# Altium PCB Internal_PCB_Thermostat_STM8_v1.0.PcbDoc
Units mm, origin at the board's own origin, x right, y up, seen from the top; angles counter-clockwise.
Board outline 56 x 90 mm, 2 copper layers (Top Layer, Bottom Layer), stack 1.671 mm thick; 60 components, 51 nets, 218 pads, 338 vias.
Unrouted connection lines stored in the file: 20.
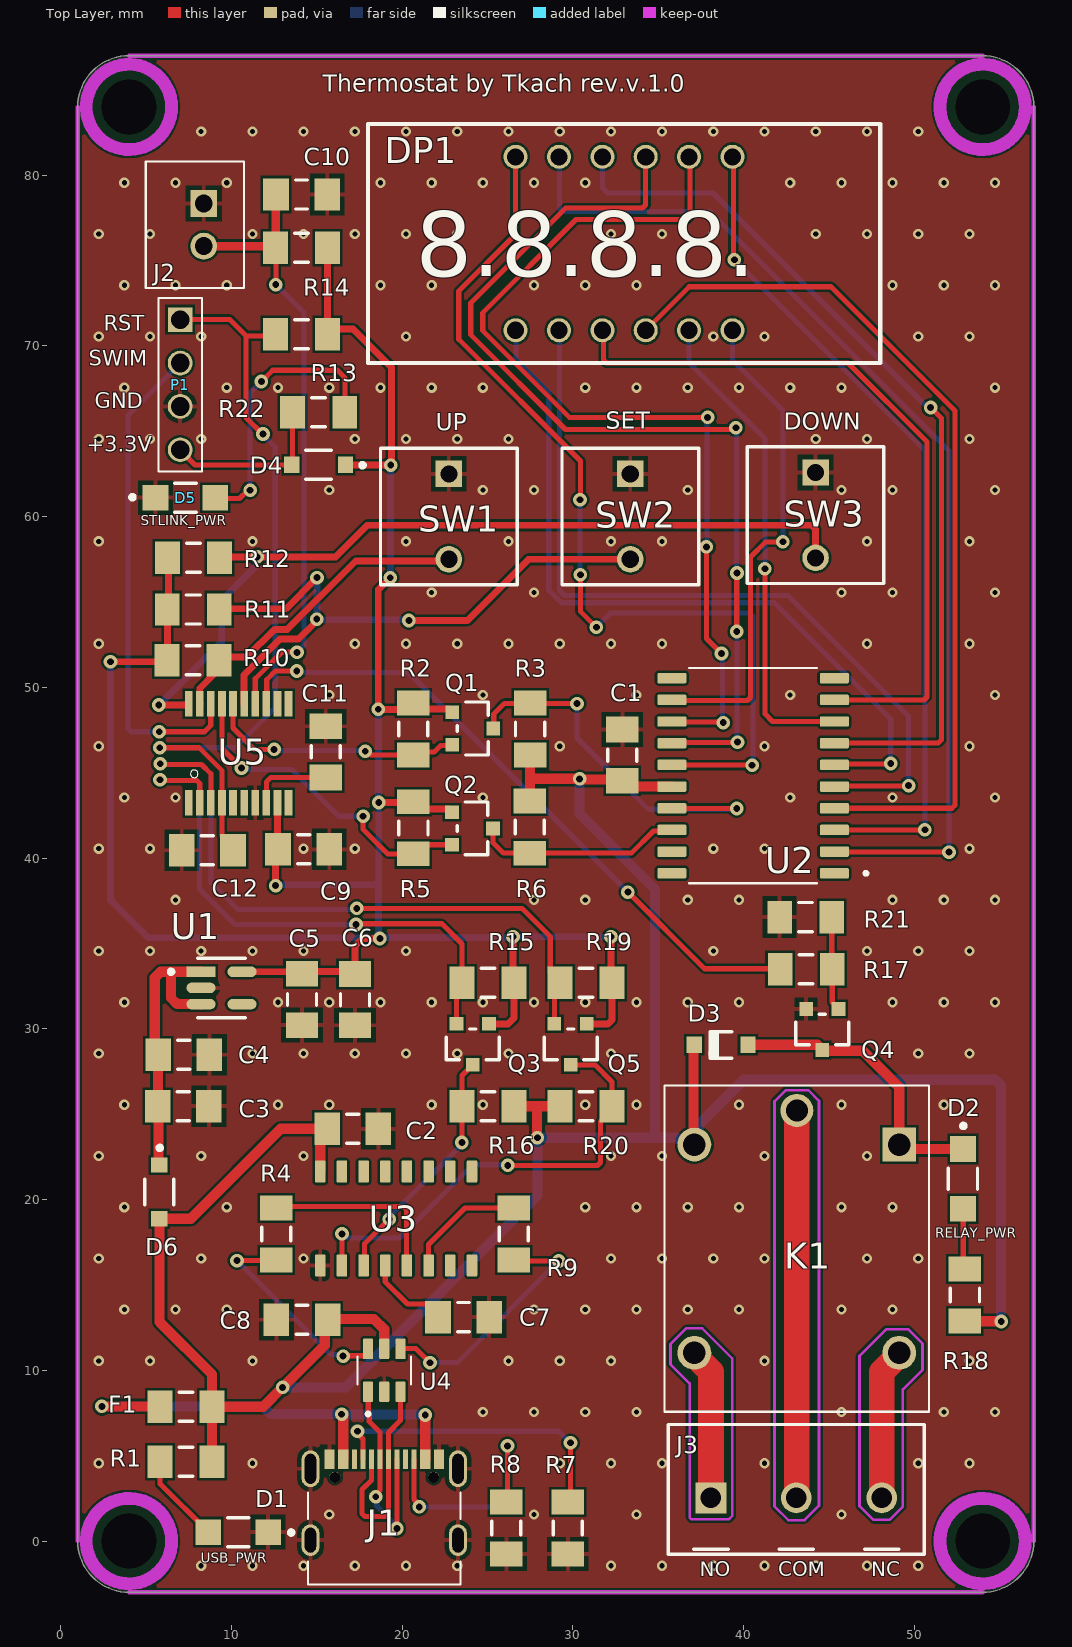
[diagram p0: Top Layer view]
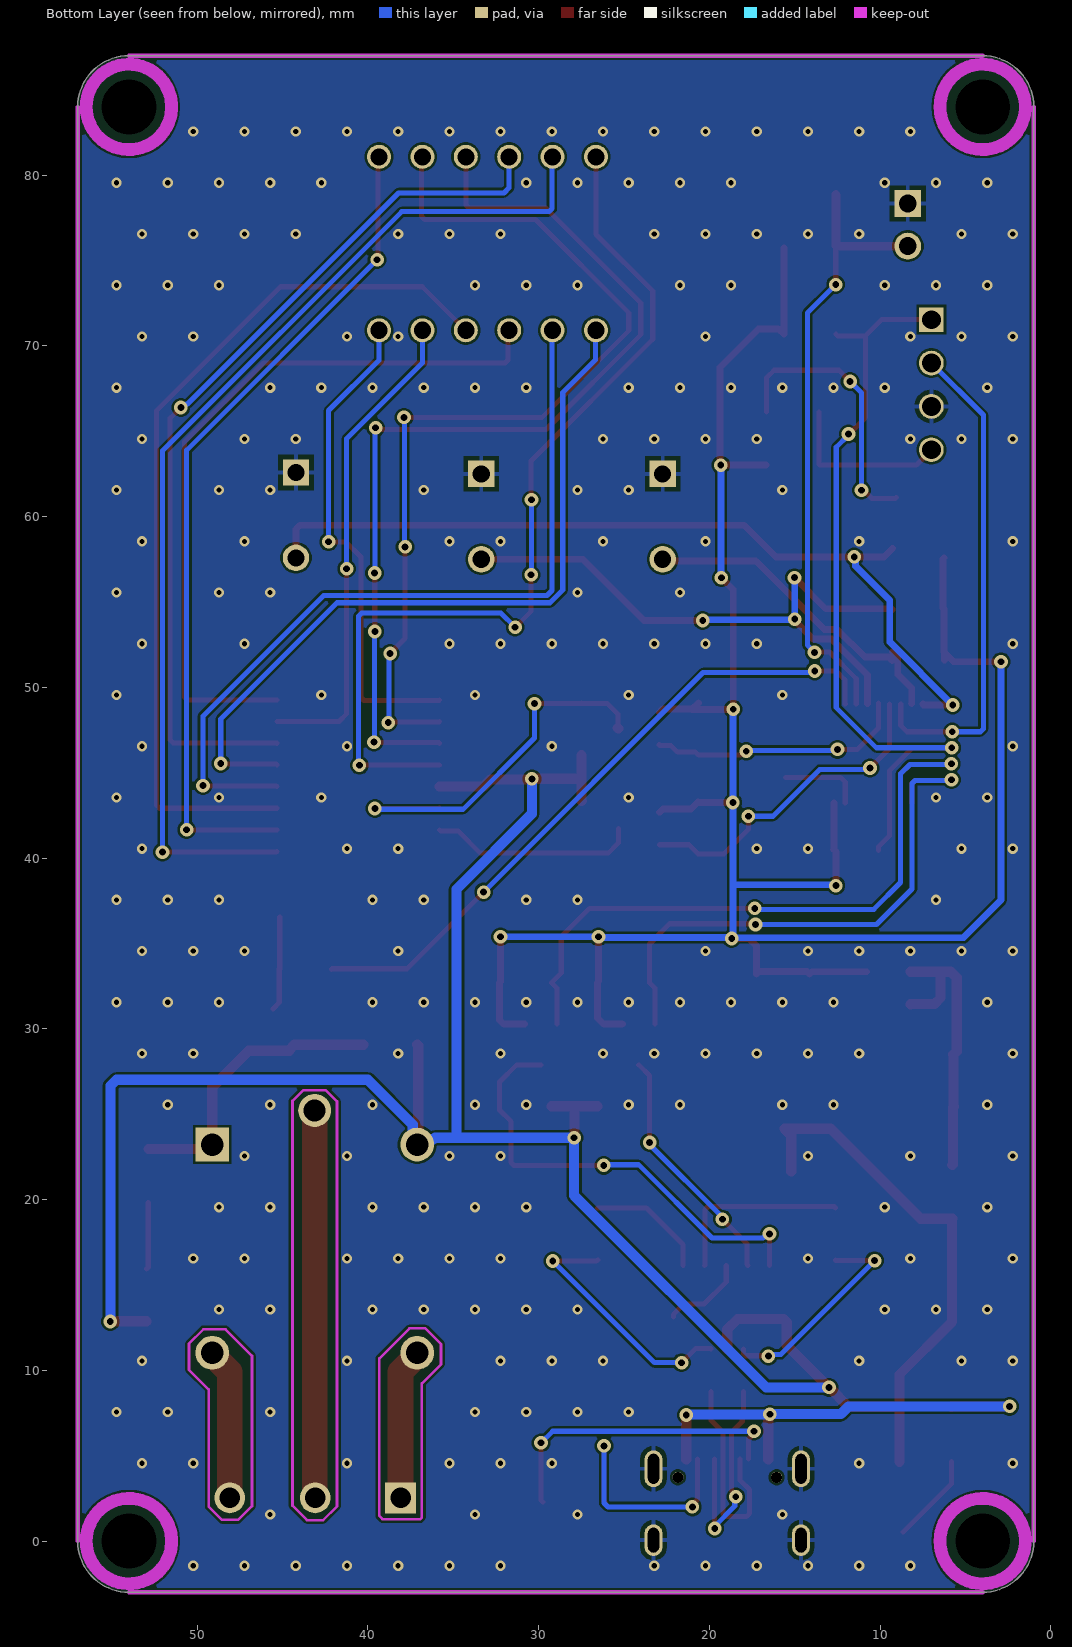
[diagram p1: Bottom Layer view, seen from below]

## Layer stack, top to bottom
Top Solder: solder mask 0.0102, Solder Resist, Dk 3.5
Top Layer: signal copper 0.0356
Dielectric 1: dielectric 1.6, FR-4, Dk 4.8
Bottom Layer: signal copper 0.0356
Bottom Solder: solder mask 0.0102, Solder Resist, Dk 3.5

## Board outline
1,0 ccw(c4,0) 4,-3 54,-3 ccw(c54,0) 57,0 57,84 ccw(c54,84) 54,87 4,87 ccw(c4,84) 1,84

## Design rules (kind name [scope] priority, off if disabled: settings)
Clearance [All] p1: gap=0.135 ignorepadtopadclearanceinfootprint=FALSE
ComponentClearance [All] p1: gap=0.18 collisioncheckmode=3 verticalgap=0.18 showdistances=FALSE
DiffPairsRouting [All] p1: maxlimit=0.18 minlimit=0.17 mostfreqgap=0.18 toplayer_minwidth=0.381 toplayer_maxwidth=0.381 toplayer_prefwidth=0.381 bottomlayer_minwidth=0.381 bottomlayer_maxwidth=0.381 bottomlayer_prefwidth=0.381 maxuncoupledlength=12.7
HoleSize [All] p1: absolutevalues=TRUE maxlimit=3.54 minlimit=0.025 maxpercent=80.000 minpercent=20.000
MinimumSolderMaskSliver [All] p1: minsoldermaskwidth=0.1
PolygonConnect PolygonConnect_GND [IsVia AND NOT IsComponent] p1: connectstyle=Direct reliefconductorwidth=0.3 reliefentries=4 polygonreliefangle="90 Angle" airgapwidth=0.3
PolygonConnect PolygonConnect_1 [All] p2: connectstyle=Relief reliefconductorwidth=0.254 reliefentries=4 polygonreliefangle="90 Angle" airgapwidth=0.254
RoutingVias [All] p1: holewidth=0.4 width=0.8 viastyle="Through Hole" minholewidth=0.3 minwidth=0.6 maxholewidth=0.711 maxwidth=1.27
SilkToSilkClearance [All] p1: silktosilkclearance=0.16
SilkToSolderMaskClearance [IsPad] p1: minsilkscreentomaskgap=0.154 clearancetoexposedcopper=TRUE
SolderMaskExpansion Via_Tenting [IsVia] p1: expansion=0.102 istentingtop=TRUE
SolderMaskExpansion SolderMaskExpansion_1 [All] p2: expansion=0 istentingtop=FALSE
SupplyNets "Schematic Supply Nets_2" [InNet('+5V')] p1: voltage=0.000
SupplyNets "Schematic Supply Nets_1" [InNet('+3.3V')] p2: voltage=0.000
SupplyNets "Schematic Supply Nets" [InNet('GND')] p3: voltage=0.000
Width Width_Power [InNet('GND') or InNet('+5V') or InNet('+3.3V')] p1: maxlimit=3.5 minlimit=0.18 preferedwidth=0.6
Width Width_1 [All] p2: maxlimit=3.5 minlimit=0.16 preferedwidth=0.3
24 further rules are at their usual default settings.

## Classes and differential pairs
component class U_UART: C2 C7 Q3 Q5 R15 R16 R19 R20 U3
component class U_TM1637_Display: C1 DP1 Q1 Q2 R2 R3 R5 R6 U2
component class U_Relay: D2 D3 J3 K1 Q4 R17 R18 R21
component class U_Power: C3 C4 C5 C6 C8 D1 D6 F1 J1 R1 R4 R7 R8 R9 U1 U4
component class U_NTC: C10 J2 R14
component class U_STM8S103F3P6: 3 C9 C11 C12 D4 D5 P1 R10 R11 R12 R13 R22 SW1 SW2 SW3 U5

## Components (designator, comment, footprint, x,y, rotation, side; value= is the part's Value field where it differs from the comment)
C1 "C1206C104K5RACAUTO" CAPC3216X18M 32.901,46.035 r90 top value="0.10 μF"
C2 "C1206C104K5RACAUTO" CAPC3216X18M 17.108,24.144 r0 top value="0.10 μF"
C3 "CGA5L1X7R1C106KT0Y0N" CAPC3216X18M 7.184,25.474 r0 top
C4 "CC1206KFX7R7BB105" CAPC3216X18M 7.211,28.486 r0 top value="1 uF"
C5 "CGA5L1X7R1C106KT0Y0N" CAPC3216X18M 14.135,31.723 r270 top
C6 "CC1206KFX7R7BB105" CAPC3216X18M 17.241,31.712 r270 top value="1 uF"
C7 "C1206C104K5RACAUTO" CAPC3216X18M 23.599,13.121 r0 top value="0.10 μF"
C8 "C1206C104K5RACAUTO" CAPC3216X18M 14.135,12.964 r180 top value="0.10 μF"
C9 "C1206C104K5RACAUTO" CAPC3216X18M 14.229,40.516 r0 top value="0.10 μF"
C10 "C1206C104K5RACAUTO" CAPC3216X18M 14.111,78.872 r180 top value="0.10 μF"
C11 "C1206C225K5RACAUTO" CAPC3216X18M 15.529,46.226 r90 top
C12 "C1206C104K5RACAUTO" CAPC3216X18M 8.596,40.465 r180 top value="0.10 μF"
D1 "LTST-C150KRKT" FP-LTST-C150KRKT-MFG 10.402,0.526 r180 top
D2 "LTST-C150KRKT" FP-LTST-C150KRKT-MFG 52.851,21.217 r270 top
D3 "1N4148W-7-F" DIOD-SOD123-2_V 38.683,29.066 r180 top
D4 "1N5819HW-7-F" FP-SOD123-MFG 15.109,63.036 r180 top
D5 "LTST-C150KRKT" FP-LTST-C150KRKT-MFG 7.307,61.115 r0 top
D6 "1N5819HW-7-F" FP-SOD123-MFG 5.778,20.451 r270 top
DP1 "Display" 3461BS-1 33,76 r0 top
F1 "MF-NSMF050-2" RESC3216X06M 7.344,7.873 r0 top value=0.15-0.7Ω
J1 "USB_TYPE_C_2_0" "USB TYPE-C 16PIN" 18.954,0.054 r0 top
J2 "B2B-XH-A" JST_B2B-XH-A 7.857,77.098 r90 top
J3 "39543-0603" 39543-0603 43.092,3.029 r180 top
K1 "SRD-05VDC-SL-C" RELAY_SRD-05VDC-SL-C 43.118,17.124 r270 top
P1 "61300411121" WURTH_61300411121 7,67.73 r270 top
Q1 "2N7002-7-F" FP-SOT23-MFG 24.137,47.594 r0 top
Q2 "2N7002-7-F" FP-SOT23-MFG 24.127,41.737 r0 top
Q3 "2N7002-7-F" FP-SOT23-MFG 24.137,29.094 r270 top
Q4 "2N7002-7-F" FP-SOT23-MFG 44.615,29.966 r270 top
Q5 "2N7002-7-F" FP-SOT23-MFG 29.87,29.094 r270 top
R1 "CRGCQ1206F1K0" RESC3216X06M 7.344,4.642 r180 top value=1KΩ
R2 "CRGP1206F10K" RESC3216X06M 20.648,47.568 r270 top value=10KΩ
R3 "CRGP1206F10K" RESC3216X06M 27.493,47.568 r90 top value=10KΩ
R4 "SR0603FR-7T22RL" RESC3216X06M 12.622,17.989 r90 top value=22Ω
R5 "CRGP1206F10K" RESC3216X06M 20.665,41.777 r270 top value=10KΩ
R6 "CRGP1206F10K" RESC3216X06M 27.483,41.816 r270 top value=10KΩ
R7 "ESR18EZPF5101" RESC3216X06M 29.712,0.76 r90 top
R8 "ESR18EZPF5101" RESC3216X06M 26.109,0.76 r90 top
R9 "SR0603FR-7T22RL" RESC3216X06M 26.543,17.989 r90 top value=22Ω
R10 "CRGP1206F10K" RESC3216X06M 7.754,51.594 r180 top value=10KΩ
R11 "CRGP1206F10K" RESC3216X06M 7.768,54.565 r180 top value=10KΩ
R12 "CRGP1206F10K" RESC3216X06M 7.784,57.591 r180 top value=10KΩ
R13 "CRGP1206F10K" RESC3216X06M 14.111,70.687 r0 top value=10KΩ
R14 "CRGP1206F10K" RESC3216X06M 14.111,75.755 r180 top value=10KΩ
R15 "CRGCQ1206F1K0" RESC3216X06M 25.035,32.702 r0 top value=1KΩ
R16 "CRGCQ1206F1K0" RESC3216X06M 25.03,25.474 r0 top value=1KΩ
R17 "CRGCQ1206F1K0" RESC3216X06M 43.667,33.495 r180 top value=1KΩ
R18 "CRGCQ1206F1K0" RESC3216X06M 52.968,14.41 r90 top value=1KΩ
R19 "CRGCQ1206F1K0" RESC3216X06M 30.768,32.702 r0 top value=1KΩ
R20 "CRGCQ1206F1K0" RESC3216X06M 30.768,25.474 r180 top value=1KΩ
R21 "CRGP1206F10K" RESC3216X06M 43.638,36.551 r0 top value=10KΩ
R22 "CRGCQ1206F1K0" RESC3216X06M 15.109,66.116 r0 top value=1KΩ
SW1 "EVQ-QJJ05Q" FP-EVQ-QJJ05Q-MFG 22.737,60.005 r0 top
SW2 "EVQ-QJJ05Q" FP-EVQ-QJJ05Q-MFG 33.364,60.005 r0 top
SW3 "EVQ-QJJ05Q" FP-EVQ-QJJ05Q-MFG 44.216,60.089 r0 top
U1 "AP2112K-3.3TRG1" FP-SOT25-IPC_A 9.419,32.398 r0 top
U2 "TM1637_SOP20" SOIC127P1035X255-20N 40.559,44.828 r180 top
U3 "CH340C" SOIC127P600X180-16N 19.647,18.894 r90 top
U4 "USBLC6-2SC6" SOT95P280X145-6N 18.954,10 r90 top
U5 "STM8S103F3P6" SOP65P640X120-20N 10.422,46.139 r90 top

## Footprints (in the part's own frame and the unit in brackets; to place one, negate y for a bottom-side part, rotate by r counter-clockwise, add the part's x,y. Pads: shape width x height; smd on the part's side, far side on the other; paste and mask are expansions set on the pad)
3461BS-1 [mm] "4 digit 7 segment led common anode led display"
  round 1.406 hole 1: D1(-6.35,5.08) D2(1.27,5.08) D3(3.81,5.08) D4(6.35,-5.08) DP(-1.27,-5.08) SEGA(-3.81,5.08) SEGB(6.35,5.08) SEGC(1.27,-5.08) SEGD(-3.81,-5.08) SEGE(-6.35,-5.08) SEGF(-1.27,5.08) SEGG(3.81,-5.08)
  silkscreen extent -15,-7 15,7, body extent -14.92,-6.98 15.08,7.01, height 7.6
39543-0603 [mm]
  rect 1.8x1.8 / inner round 1.8 / far side rect 1.8x1.8 hole 1.2: 1(5,0.5)
  round 1.8 hole 1.2: 2(0,0.5) 3(-5,0.5)
  silkscreen extent -7.5,-3.8 7.5,3.8, body extent -7.53,-3.99 8.07,3.61, height 10.5
CAPC3216X18M [mm] "Chip Capacitor, 2-Leads, Body 3,20x1,60mm, IPC Low Density"
  rect 1.5x1.9 smd: 1(-1.5,0) 2(1.5,0)
  silkscreen extent -0.35,-0.85 0.35,0.85, body extent -1.7,-0.9 1.7,0.9, height 1.8
DIOD-SOD123-2_V [mm] "SOD123, 2-Leads, Body 2.7x1.55mm, Height 1.45mm"
  rect 0.9x0.95 smd: 1(-1.575,0) 2(1.575,0)
  silkscreen extent -0.64,-0.82 0.64,0.77, body extent -1.35,-0.77 1.35,0.77, height 1.45
FP-EVQ-QJJ05Q-MFG [mm]
  rect 1.55x1.55 hole 1 paste-2539.97 mask+0: A(0,2.5)
  round 1.55 hole 1 paste-2539.97 mask+0: B(0,-2.5)
  silkscreen extent -4,-4 4,4, body extent -4.4,-4.1 4.1,4.1, height 0.25
FP-LTST-C150KRKT-MFG [mm]
  rect 1.5x1.5 smd paste+0 mask+0: 1(-1.75,0) 2(1.75,0)
  silkscreen extent -3.22,-0.85 0.63,0.85, body extent -2.6,-0.95 2.6,0.95, height 0.25
FP-SOD123-MFG [mm]
  rect 0.9x0.95 smd paste+0 mask+0: 1(-1.575,0) 2(1.575,0)
  silkscreen extent -2.7,-0.85 0.75,0.85, body extent -2.12,-0.95 2.12,0.95, height 0.25
FP-SOT23-MFG [mm]
  rect 0.8x0.8 smd paste+0 mask+0: 1(-1.2,0.95) 2(-1.2,-0.95) 3(1.2,0)
  silkscreen extent -0.9,-1.55 0.9,1.55, body extent -1.7,-1.78 1.7,1.78, height 0.25
FP-SOT25-IPC_A [mm]
  rect 1.707x0.616 smd paste+0 mask+0: 1(-1.201,0.95)
  rrect100% 1.707x0.616 smd paste+0 mask+0: 2(-1.201,0) 3(-1.201,-0.95) 4(1.201,-0.95) 5(1.201,0.95)
  silkscreen extent -3.08,-1.75 1.4,1.75, body extent -2.55,-2 2.55,2, height 0.25
JST_B2B-XH-A [mm]
  rect 1.575x1.575 / inner round 1.575 / far side rect 1.575x1.575 hole 1.05: 1(1.25,-0.525)
  round 1.575 hole 1.05: 2(-1.25,-0.525)
  silkscreen extent -3.7,-2.88 3.7,2.88, body extent -3.81,-2.96 3.69,2.94, height 7
RELAY_SRD-05VDC-SL-C [mm]
  rect 1.98x1.98 / inner round 1.98 / far side rect 1.98x1.98 hole 1.32: A1(-6.1,6)
  round 1.98 hole 1.32: A2(-6.1,-6) NC(6.1,6) NO(6.1,-6)
  round 1.935 hole 1.29: COM(-8.1,0)
  silkscreen extent -9.55,-7.75 9.55,7.75, body extent -9.6,-7.8 9.6,7.8, height 15.8
RESC3216X06M [mm] "Chip Resistor, 2-Leads, Body 3,20x1,60mm, IPC Low Density"
  rect 1.45x1.9 smd: 1(-1.525,0) 2(1.525,0)
  silkscreen extent -0.4,-0.85 0.4,0.85, body extent -1.7,-0.9 1.7,0.9, height 0.6
SOIC127P600X180-16N [mm]
  rrect25% 1.31x0.62 smd: 1(-2.75,4.445) 2(-2.75,3.175) 3(-2.75,1.905) 4(-2.75,0.635) 5(-2.75,-0.635) 6(-2.75,-1.905) 7(-2.75,-3.175) 8(-2.75,-4.445) 9(2.75,-4.445) 10(2.75,-3.175) 11(2.75,-1.905) 12(2.75,-0.635) 13(2.75,0.635) 14(2.75,1.905) 15(2.75,3.175) 16(2.75,4.445)
  body extent -3,-5 3,5, height 1.8
SOIC127P1035X255-20N [mm]
  rrect25% 1.7x0.61 smd: 1(-4.76,5.715) 2(-4.76,4.445) 3(-4.76,3.175) 4(-4.76,1.905) 5(-4.76,0.635) 6(-4.76,-0.635) 7(-4.76,-1.905) 8(-4.76,-3.175) 9(-4.76,-4.445) 10(-4.76,-5.715) 11(4.76,-5.715) 12(4.76,-4.445) 13(4.76,-3.175) 14(4.76,-1.905) 15(4.76,-0.635) 16(4.76,0.635) 17(4.76,1.905) 18(4.76,3.175) 19(4.76,4.445) 20(4.76,5.715)
  silkscreen extent -6.71,-6.3 3.75,6.3, body extent -5.18,-6.3 5.18,6.3, height 2.55
SOP65P640X120-20N [mm]
  rect 1.5x0.45 smd: 1(-2.9,2.925) 2(-2.9,2.275) 3(-2.9,1.625) 4(-2.9,0.975) 5(-2.9,0.325) 6(-2.9,-0.325) 7(-2.9,-0.975) 8(-2.9,-1.625) 9(-2.9,-2.275) 10(-2.9,-2.925) 11(2.9,-2.925) 12(2.9,-2.275) 13(2.9,-1.625) 14(2.9,-0.975) 15(2.9,-0.325) 16(2.9,0.325) 17(2.9,0.975) 18(2.9,1.625) 19(2.9,2.275) 20(2.9,2.925)
  silkscreen extent -1.42,2.38 -0.98,2.82, body extent -3.2,-3.25 3.2,3.25, height 1.73
SOT95P280X145-6N [mm]
  rrect25% 1.21x0.59 smd: 1(-1.255,0.95) 2(-1.255,0) 3(-1.255,-0.95) 4(1.255,-0.95) 5(1.255,0) 6(1.255,0.95)
  silkscreen extent -2.65,-1.57 0.81,1.57, body extent -1.4,-1.46 1.4,1.46, height 1.4
"USB TYPE-C 16PIN" [mm] "USB Type C Receptacle SMT Single Row 16Pin"
  rect 0.6x1.15 smd: A1/B12(-3.2,4.745) A4/B9(-2.4,4.745) B1/A12(3.2,4.745) B4/A9(2.4,4.745)
  rect 0.3x1.15 smd: A5(-1.25,4.745) A6(-0.25,4.745) A7(0.25,4.745) A8(1.25,4.745) B5(1.75,4.745) B6(0.75,4.745) B7(-0.75,4.745) B8(-1.75,4.745)
  oval 1.05x2.15 hole 0.65 slot 1.75 at 90 deg: SH1(-4.32,4.18) SH2(4.32,4.18)
  oval 1.05x1.85 hole 0.65 slot 1.45 at 90 deg: SH3(-4.32,0) SH4(4.32,0)
  round 0.65 hole 0.65 unplated: ""(-2.89,3.68) ""(2.89,3.68)
  silkscreen extent -4.47,-2.6 4.47,2.79, body extent -4.47,-2.6 4.47,5, height 3.26
WURTH_61300411121 [mm]
  rect 1.45x1.45 / inner round 1.45 / far side rect 1.45x1.45 hole 1.1: 1(-3.81,0)
  round 1.45 hole 1.1: 2(-1.27,0) 3(1.27,0) 4(3.81,0)
  silkscreen extent -5.08,-1.27 5.08,1.27, body extent -5.08,-1.27 5.08,1.27, height 7.27

## Part data
C1 C2 C7 C8 C9 C10 C12: library part CMP-03020-005759-1, "CAP CER 0.1UF 50V X7R 1206", Capacitance="0.10 μF", Manufacturer=KEMET, Package=C1206C-EB, Temperature="-55°C to +150°C", Temperature Characteristic=X7R, Temperature Coefficient=15%, Temperature Range High=+150°C, Temperature Range Low=-55°C, Tolerance=0.1, Voltage Rating="50 V", Automotive=Yes, Automotive Grade="Grade 0", Category=Cap, ComponentLink2Description=Datasheet, ComponentLink2URL=https://content.kemet.com/datasheets/KEM_C1007_X8R_ULTRA_150C_SMD.pdf, Device Class L1="Passive Components", Device Class L2=Capacitors, Device Class L3="Ceramic Capacitors", Digikey Description="CAP CER 0.1UF 50V X7R 1206", Height=0.88mm, Ipc Land Pattern Name=CAPC320160X78, Lead Free=Yes, Manufacturer Part Number=C1206C104K5RACAUTO, Material=Ceramic, Mouser Description="Multilayer Ceramic Capacitors MLCC - SMD/SMT 0.1uF 50volts 10% X7R AUTO", Octopart=https://octopart.com/c1206c104k5racauto-kemet-12595586, RoHS=TRUE
C3 C5: library part CMP-08246-001386-1, "Cap Ceramic 10uF 16V X7R 10% Pad SMD 1206 +125°C Automotive T/R", Capacity=10uF
C4 C6: library part CMP-03422-001151-1, "CC1206 1 uF X7R 10.00%16 V", Capacitance="1 uF", Manufacturer=Yageo, Package=CC1206-1.25, Temperature="-55°C to +125°C", Temperature Characteristic=X7R, Temperature Coefficient=15%, Temperature Range High=+125°C, Temperature Range Low=-55°C, Tolerance=0.1, Voltage Rating="16 V", Automotive=No, Automotive Grade=NA, Category=Cap, ComponentLink2Description=Datasheet, ComponentLink2URL=http://www.yageo.com/documents/recent/UPY-NP0X7R_HV_1KV-to-3KV_11.pdf, Device Class L1="Passive Components", Device Class L2=Capacitors, Device Class L3="Ceramic Capacitors", Footprint Url=http://www.yageo.com/exep/pages/download/literatures/UPY-C_GEN_24.pdf, Height=1.45mm, Lead Free=Yes, Manufacturer Part Number=CC1206KFX7R7BB105, Material=Ceramic, Mouser Description="Multilayer Ceramic Capacitors MLCC - SMD/SMT 1.0uF 16V X7R 10%", Octopart=https://octopart.com/cc1206kfx7r7bb105-yageo-22250947, RoHS=TRUE
C11: library part CMP-03020-034660-1, "CAP CER 2.2UF 50V X7R 1206", Capacitance=2.2uF, Case Code (Imperial)=1206, Case Code (Metric)=3216, Dielectric=X7R, Dielectric Material=Ceramic, Max Operating Temperature=125°C, Min Operating Temperature=-55°C, Package Quantity=1, Ratings=AEC-Q200, Tolerance=10%, Voltage Rating=50V, Case/Package=1206, Construction=Flat, Contact Plating=Tin, Depth=1.6mm, Height=1.6mm, Length=3.2mm, Mount="Surface Mount", Packaging="Tape and Reel", Radiation Hardening=No, REACH SVHC="No SVHC", RoHS Compliant=Yes, Series=C, Termination=SMD/SMT, Thickness=0.071inch, Voltage Rating (DC)=50V, Width=0.063inch
D1 D2 D5: library part 8706943c75ba83719d021d2fdc84c58, "LED RED CLEAR 1206 SMD", Case Code (Imperial)=1206, Case Code (Metric)=3216, Color=Red, Forward Current=30mA, Forward Voltage=2V, Lens Color=Colorless, Max Operating Temperature=85°C, Min Operating Temperature=-30°C, Package Quantity=1, Power Dissipation=62.5mW, Power Rating=75mW, Reverse Voltage=5V, Test Current=20mA, Case/Package=1206, Depth=1.6mm, Dominant Wavelength=631nm, Height=1.1mm, Illumination Color=Red, Lead Free="Lead Free", Length=3.2mm, Lens Style=Diffused, Lens Transparency=Clear, Luminous Intensity=54mcd, Mount="Surface Mount", Number of Elements=1, Number of LEDs=1, Number of Pins=2, Packaging="Tape and Reel", Radiation Hardening=No, Viewing Angle=130°, Wavelength=639nm, Width=1.6mm
D3: library part CMP-2000-04932-2, "Fast Switching Diode, 100 V, 0.15 A, -65 to 150 degC, 2-Pin?SOD123, RoHS, Tape and Reel", If - Forward Current=0.15A, Ir - Reverse Current=1uA, Manufacturer=DiodesIncorporated, Max Surge Current=2A, Maximum Operating Temperature=+150C, Minimum Operating Temperature=-65C, Operating Temperature Range=-65Cto+150C, Package / Case=SOD-123, Package Reference=SOD123-2, Peak Reverse Voltage=100V, Vf - Forward Voltage=1.25V, Brand=DiodesIncorporated, Configuration=Single, Datasheet URL=http://www.farnell.com/datasheets/1915529.pdf, Datasheet Version="Rev. 24-2, 10/2013", Factory Pack Quantity=3000, Height=1.25mm, Length=2.85mm, Manufacturer URL=http://www.diodes.com/, Mounting Style=SMD/SMT, Package URL=http://www.diodes.com/datasheets/ds18004.pdf, Packaging=Reel, Product=SwitchingDiodes, Product Category=Diodes-GeneralPurpose,Power,Switching, Recovery Time=4ns, RoHS=True, Series=1N4148, Type=SwitchingDiode, Unit Weight=0.000353oz, Width=1.7mm
D4 D6: library part CMP-0303-00003-3, "DIODE SCHOTTKY 40V 1A SOD123", Average Rectified Current=1A, Capacitance=110pF, Case/Package=SOD-123-2, Forward Voltage=450mV, Max Forward Surge Current (Ifsm)=25A, Max Operating Temperature=125°C, Max Power Dissipation=450mW, Max Repetitive Reverse Voltage (Vrrm)=40V, Min Operating Temperature=-65°C, Package Quantity=3000, Peak Reverse Current=50uA, Contact Plating=Tin, Current Rating=1A, Element Configuration=Single, Forward Current=1A, Height=1.25mm, Lead Free="Lead Free", Length=2.85mm, Max Reverse Voltage (DC)=40V, Number of Pins=2, Output Current=1A, Packaging="Tape and Reel", Peak Non-Repetitive Surge Current=25A, Polarity=Standard, Radiation Hardening=No, REACH SVHC="No SVHC", Termination=SMD/SMT, Voltage Rating (DC)=40V, Weight=0.000353oz, Width=1.7mm
DP1: library part Component_1_1
F1: library part CMP-07400-000036-1, "PTC RESET FUSE 13.2V 500MA 1206", Ambient Temperature Range High=+85°C, Ambient Temperature Range Low=-40°C, Current Rating=100A, Hold Current=0.5A, Manufacturer=Bourns, Resistance=0.15-0.7Ω, Temperature="-40°C to +85°C", Trip Current=1A, Voltage Rating=13.2V, Automotive=Yes, Automotive Grade="Grade 3", Category=Fuse, ComponentLink2Description=Datasheet, ComponentLink2URL=https://www.bourns.com/docs/product-datasheets/mfnsmf.pdf?sfvrsn=39c76af6_14, Device Class L1="Circuit Protection", Device Class L2="PTC Resettable Fuses", Device Class L3=unset, Digikey Description="PTC RESET FUSE 13.2V 500MA 1206", Height=0.85mm, Lead Free=Yes, Manufacturer Part Number=MF-NSMF050-2, Mouser Description="Resettable Fuses - PPTC 0.50A 13.2V 0.15ohm 1206 Footprint", Octopart=https://octopart.com/mf-nsmf050-2-bourns-34532, Package=MF-NSMF050-2, RoHS=TRUE, Temperature Range High=+85°C, Temperature Range Low=-40°C, Trip Time=0.1s
J1: library part USB_CMP-002-00072-1, "USB-C (USB TYPE-C) USB 2.0 Receptacle Connector 24 (16+8 Dummy) Position Surface Mount, Right Angle", Case/Package=None, Check_prices=https://www.snapeda.com/parts/USB4110GFA/Global+Connector+Technology/view-part/?ref=eda, Component Type=Connectors, Design Item ID=USB4110GFA, MF="Global Connector Technology", MP=USB4110GFA, Pins=16, SnapEDA_Link=https://www.snapeda.com/parts/USB4110GFA/Global+Connector+Technology/view-part/?ref=snap, Source=USB4110GFA.SchLib
J2: library part CMP-033-000000-1, Package=None, Availability=Unavailable, Component Type=Standard, Design Item ID=B2B-XH-A, MF="{'manufacturer': u'JST Sales America Inc.'}", MP=B2B-XH-A, Pin Count=2, Price=None, Source=B2B-XH-A.SchLib
J3: library part CMP-037-000000-1, "3 Position Wire to Board Terminal Block Horizontal with Board 0.197 (5.00mm) Through Hole", Package=None, Check_prices=https://www.snapeda.com/parts/395430603/Molex/view-part/?ref=eda, Component Type=Mechanicals, Design Item ID=39543-0603, MF=Molex, MP=395430603, Pin Count=3, SnapEDA_Link=https://www.snapeda.com/parts/395430603/Molex/view-part/?ref=snap, Source=39543-0603.SchLib
K1: library part CMP-013-000000-1, "5V Trigger Relay Module For Arduino And Raspberry Pi 5V Trigger Relay Module For Arduino And Raspberry Pi", Package="NON STANDARD-5 Songle Relay", Availability="Not in stock", Check_prices=https://www.snapeda.com/parts/SRD-05VDC-SL-C/Songle+Relay/view-part/?ref=eda, Component Type=Standard, Design Item ID=SRD-05VDC-SL-C, MF="Songle Relay", MP=SRD-05VDC-SL-C, Pin Count=5, Price=None, SnapEDA_Link=https://www.snapeda.com/parts/SRD-05VDC-SL-C/Songle+Relay/view-part/?ref=snap, Source=SRD-05VDC-SL-C.SchLib
P1: "Connector Header Through Hole 4 position 0.100 (2.54mm)", Package=None, Check_prices=https://www.snapeda.com/parts/61300411121/W%25C3%25BCrth+Elektronik+Midcom/view-part/?ref=eda, MF="WÃ¼rth Elektronik", MP=61300411121, SnapEDA_Link=https://www.snapeda.com/parts/61300411121/W%25C3%25BCrth+Elektronik+Midcom/view-part/?ref=snap
Q1 Q2 Q3 Q4 Q5: library part 3b9c635fedb024a5347a57b145af9cc, "MOSFET N-CH 60V 115MA SOT23-3", Case/Package=SOT-23, Continuous Drain Current (ID)=115mA, Drain to Source Breakdown Voltage=70V, Drain to Source Resistance=7.5R, Drain to Source Voltage (Vdss)=60V, Gate to Source Voltage (Vgs)=20V, Input Capacitance=50pF, Max Operating Temperature=150°C, Max Power Dissipation=300mW, Min Operating Temperature=-55°C, Package Quantity=3000, Power Dissipation=540mW, Threshold Voltage=2.5V, Contact Plating=Tin, Current Rating=115mA, Dual Supply Voltage=60V, Element Configuration=Single, Fall Time=5.6ns, Height=1mm, Lead Free="Lead Free", Length=2.9mm, Mount="Surface Mount", Nominal Vgs=2.5V, Number of Channels=1, Number of Elements=1, Number of Pins=3, On-State Resistance=7.5R, Packaging="Tape and Reel", Radiation Hardening=No, Rds On Max=7.5R, REACH SVHC="No SVHC", Rise Time=3ns, Termination=SMD/SMT, Turn-Off Delay Time=11ns, Turn-On Delay Time=7ns, Voltage=60V, Voltage Rating (DC)=60V, Weight=0.000282oz, Width=1.3mm
R1 R15 R16 R17 R18 R19 R20 R22: library part CMP-03211-006592-1, "CRGCQ1206 1KΩ 0.25W 1% ±100ppm/°C 200V", Ambient Temperature Range High=+70°C, Manufacturer="TE Connectivity", Package=CRGCQ1206, Power Rating=0.25W, Resistance=1KΩ, Temperature="-55°C to +155°C", Temperature Coefficient=±100ppm/°C, Temperature Range High=+155°C, Temperature Range Low=-55°C, Tolerance=0.01, Voltage Rating=200V, Automotive=Yes, Automotive Grade="Grade 685", Category=Res, ComponentLink2Description=Datasheet, ComponentLink2URL=https://www.te.com/commerce/DocumentDelivery/DDEController?Action=showdoc&DocId=Data+Sheet%7F1773204-3%7F1%7Fpdf%7FEnglish%7FENG_DS_1773204-3_1.pdf%7F4-2176347-694, Composition="Thick Film", Device Class L1="Passive Components", Device Class L2=Resistors, Device Class L3="Chip SMD Resistors", Height=0.65mm, Ipc Land Pattern Name=RESC310155X55, Lead Free=Yes, Manufacturer Part Number=CRGCQ1206F1K0, Octopart=https://octopart.com/crgcq1206f1k0-te+connectivity-91018258, RoHS=TRUE, Series=CRGCQ
R2 R3 R5 R6 R10 R11 R12 R13 R14 R21: library part CMP-03211-004788-1, "CRGP 1206 10K 1%", Ambient Temperature Range High=+70°C, Manufacturer=TE, Package=CRGP1206, Power Rating=0.5W, Resistance=10KΩ, Temperature="-55°C to +155°C", Temperature Coefficient=±100ppm/°C, Temperature Range High=+155°C, Temperature Range Low=-55°C, Tolerance=0.01, Voltage Rating=200V, Automotive=No, Category=Res, ComponentLink2Description=Datasheet, ComponentLink2URL=https://www.mouser.com/datasheet/2/418/NG_DS_9-1773463-9_A-1358566.pdf, Composition="Thick Film", Device Class L1="Passive Components", Device Class L2=Resistors, Device Class L3="Chip SMD Resistors", Digikey Description="CRGP 1206 10K 1%", Height=0.65mm, Ipc Land Pattern Name=RESC310155X55, Lead Free=Yes, Manufacturer Part Number=CRGP1206F10K, Octopart=https://octopart.com/crgp1206f10k-te+connectivity-91018843, RoHS=TRUE, Series=CRGP
R4 R9: library part CMP-03412-021889-1, "RES 22 OHM 1% 1/4W 0603", Manufacturer=Yageo, Package=SR0603, Power Rating=0.25W, Resistance=22Ω, Temperature="-55°C to +155°C", Temperature Range High=+155°C, Temperature Range Low=-55°C, Tolerance=0.01, Voltage Rating=75V, Automotive=Yes, Automotive Grade="Grade 0", Category=Res, ComponentLink2Description=Datasheet, ComponentLink2URL=http://www.yageo.com/documents/recent/PYu-SR_D_F%20tol_RoHS_L_3.pdf, Composition="Thick Film", Device Class L1="Passive Components", Device Class L2=Resistors, Device Class L3="Chip SMD Resistors", Digikey Description="RES 22 OHM 1% 1/4W 0603", Footprint Url=http://www.yageo.com/exep/pages/download/literatures/PYu-R_Mount_10.pdf, Height=0.55mm, Ipc Land Pattern Name=RESC16080X45, Lead Free=Yes, Manufacturer Part Number=SR0603FR-7T22RL, Octopart=https://octopart.com/sr0603fr-7t22rl-yageo-91478080, RoHS=TRUE, Series=SR
R7 R8: library part CMP-08839-028234-1, "5.1kΩ ±1% 0.5W 1206 Anti-Surge Chip Resistor AEC-Q200", Case/Package=1206, Max Operating Temperature=155°C, Max Power Dissipation=333mW, Min Operating Temperature=-55°C, Package Quantity=5000, Resistance=5.1kR, Resistor Type="Thick Film", Temperature Coefficient=100ppm/°C, Tolerance=1%, Features="Automotive AEC-Q200", Height=0.026inch, Length=0.126inch, Number of Terminations=2, Packaging="Tape and Reel", RoHS Compliant=Yes, Series=ESR18, Width=0.063inch
SW1 SW2 SW3: library part CMP-00287-56250562-1, "EVQ-QJJ05Q Switch Tactile N.O. SPST Round Button PC Pins 0.005A 12VDC 0.8N Thru-Hole Radial T/R", Case/Package=Axial, Contact Current Rating=5mA, Contact Resistance=200mΩ, Max Operating Temperature=70°C, Max Voltage Rating (DC)=12V, Min Operating Temperature=-20°C, Operating Force=800mN, Actuator Length=1.5mm, Contact Plating=Silver, Current Rating=5mA, Electrical Life=1Mcycles, Height=5mm, Illumination Type="Illuminated, Non-Illuminated", Lead Free="Lead Free", Length=8mm, Life (Cycles)=1Mcycles, Mechanical Life=1Mcycles, Mount="Through Hole", NexarPartId=56250562, Orientation=Straight, Packaging="Tape & Box (TB)", Radiation Hardening=No, REACH SVHC="No SVHC", RoHS=Compliant, Switch Function=Off-Mom, Switch Travel=1mm, Termination="PC Pin", Throw Configuration=SPST, Voltage Rating (DC)=12V, Width=8mm
U1: library part CMP-12756-000035-1, "IC REG LINEAR 3.3V 600MA SOT25", Case/Package=SOT-23-5, Dropout Voltage=250mV, Max Input Voltage=6V, Max Operating Temperature=85°C, Max Output Current=600mA, Min Input Voltage=2.5V, Min Operating Temperature=-40°C, Output Voltage=3.3V, Package Quantity=1, Quiescent Current=55uA, Accuracy=1.5%, Height=1.3mm, Lead Free="Lead Free", Length=3.1mm, Mount="Surface Mount", Number of Outputs=1, Number of Pins=5, Number of Regulators=1, Output Current=600mA, Output Type=Fixed, Packaging="Tape and Reel", Polarity=Positive, Width=1.7mm
U2: "LED Drive Control Special Circuit", Package=Package, Check_prices=https://www.snapeda.com/parts/TM1637_SOP20/Titan+Micro+Electronics/view-part/?ref=eda, MF="Titan Micro Electronics", MP=TM1637_SOP20, SnapEDA_Link=https://www.snapeda.com/parts/TM1637_SOP20/Titan+Micro+Electronics/view-part/?ref=snap
U3: library part CMP-019-000000-1, "USB to serial chip CH340", Package=None, Availability="Not in stock", Check_prices=https://www.snapeda.com/parts/CH340C/WCH/view-part/?ref=eda, Component Type=Standard, Design Item ID=CH340C, MF=WCH, MP=CH340C, Pin Count=16, Price=None, SnapEDA_Link=https://www.snapeda.com/parts/CH340C/WCH/view-part/?ref=snap, Source=CH340C.SchLib
U4: "17V Clamp 5A (8/20Âµs) Ipp Tvs Diode Surface Mount SOT-23-6", Package="SOT-23-6 STMicroelectronics", Availability="In Stock", Check_prices=https://www.snapeda.com/parts/USBLC6-2SC6/STMicroelectronics/view-part/?ref=eda, MF=STMicroelectronics, MP=USBLC6-2SC6, Price=None, Purchase-URL=https://pricing.snapeda.com/search/part/USBLC6-2SC6/?ref=eda, SnapEDA_Link=https://www.snapeda.com/parts/USBLC6-2SC6/STMicroelectronics/view-part/?ref=snap
U5: "STM8 series Microcontroller IC 8-Bit 16MHz 8KB (8K x 8) FLASH 20-TSSOP", Package="TSSOP-20 STMicroelectronics", Check_prices=https://www.snapeda.com/parts/STM8S103F3P6/STMicroelectronics/view-part/?ref=eda, MF=STMicroelectronics, MP=STM8S103F3P6, SnapEDA_Link=https://www.snapeda.com/parts/STM8S103F3P6/STMicroelectronics/view-part/?ref=snap

## Free pads (board coordinates)
  round 0 hole 3.2 unplated: 3(4,0) 3(4,84) 3(54,0) 3(54,84)

## Via types
v1: diameter 0.6, hole 0.3, Top Layer to Bottom Layer, tented both sides, 264 vias
v2: diameter 0.8, hole 0.4, Top Layer to Bottom Layer, tented both sides, 74 vias

## Nets (pads, with @x,y where several pads share a name; then routed paths per layer and width w, separated by ;. In a path a pad name is that pad's centre, name@x,y a point inside that pad or via, vN(x,y) a via of type N, cw(c..) or ccw(c..) an arc to the next point about the centre after c; other vN are vias at no path point)
+3.3V: C5.1 C6.1 C9.1 D4.1 Q1.1 Q2.1 Q3.1 Q5.1 R2.1 R5.1 R10.2 R11.2 R12.2 R13.2 R14.1 R15.2 R19.2 U1.5 U5.9 | length 143.2
  Top Layer w0.4: v2(2.919,51.505) 5.704,51.505 6.213,52.014 R10.2@6.213,52.063 ; R10.2 6.229,52.027 6.264,52.063 R11.2@6.264,54.544 ; R11.2 6.315,54.637 6.315,57.535 R12.2 ; U1.5@10.796,33.348 C5.1@14.01,33.348 ; v2(12.593,38.391) 12.593,40.38 C9.1 12.697,40.548 U5.9 ; C5.1 14.271,33.36 17.093,33.36 C6.1 17.241,34.865 17.671,35.295 v2(18.696,35.295) ; R14.1 R13.2 15.949,71 17.137,71 19.387,68.75 19.387,63.073 v2(19.333,63.019) 19.325,63.028 16.693,63.028 D4.1 ; v2(18.607,48.726) 18.607,55.727 v2(19.301,56.421) ; v2@18.619,48.714 R2.1@21.011,48.714 ; v2(18.628,43.257) 20.62,43.257 R5.1 21.081,42.885 22.728,42.885 Q2.1 ; R2.1 21.011,48.73 22.751,48.73 Q1.1 ; Q3.1 26.212,30.294 26.56,30.641 26.56,32.702 26.493,32.768 v2(26.493,35.391) ; Q5.1 32.059,30.294 32.293,30.528 R19.2 32.238,32.757 v2(32.238,35.396)
  Bottom Layer w0.4: v2(2.919,51.505) 2.919,37.543 5.12,35.342 18.649,35.342 v2(18.696,35.295) ; v2(12.593,38.391) 12.64,38.438 18.608,38.438 ; v2(18.607,48.726) 18.617,48.715 18.617,43.268 v2(18.628,43.257) 18.628,38.726 ; 18.625,38.723 18.625,38.438 18.625,35.366 v2(18.696,35.295) ; v2(19.301,56.421) 19.317,56.437 19.317,63.003 v2(19.333,63.019) ; v2(32.238,35.396) 32.236,35.394 26.496,35.394 26.445,35.343 18.745,35.343 v2(18.696,35.295)
+5V: C1.1 C2.1 C8.1 D3.2 D6.2 F1.2 K1.A2 R1.1 R3.1 R6.1 R16.2 R18.1 R20.2 U2.16 U3.16 U4.5 | length 157.8
  Top Layer w0.6: D6.2 D6.2@5.797,18.876 ; R1.1 F1.2 ; v2(13,9) 12.992,9 11.865,7.873 F1.2 ; v2@13.038,9.038 15.466,11.466 15.466,12.827 15.643,13.004 18.346,13.004 18.949,12.401 18.949,11.26 U4.5 ; U3.16 15.212,21.654 15.212,23.748 C2.1 12.891,24.144 7.622,18.876 D6.2@5.797,18.876 ; R16.2 27.899,25.474 ; R6.1 27.493,43.351 27.493,44.697 ; R3.1 27.493,44.697 ; v2(27.925,23.625) 27.899,23.651 27.899,25.474 ; R20.2 27.899,25.474 ; U2.16 35.797,44.191 33.244,44.191 C1.1 32.83,44.605 30.435,44.605 v2(30.397,44.643) 27.547,44.643 27.493,44.697 ; D3.2 37.06,29.018 37.06,23.282 K1.A2 ; R18.1 52.979,12.874 55.081,12.874 v2(55.093,12.862) ; D6.2@5.797,18.876 5.797,12.827 8.869,9.755 F1.2
  Bottom Layer w0.6: v2(13,9) 16.689,9 27.925,20.236 v2(27.925,23.625) 34.813,23.625 ; v2(30.397,44.643) 30.397,42.603 34.813,38.187 34.813,23.625 ; K1.A2@36.911,23.017 K1.A2 ; v2(55.093,12.862) 55.083,12.872 55.083,26.664 54.731,27.016 40.016,27.016 37.382,24.382 37.382,23.488 K1.A2 ; 34.813,23.625 36.077,23.625 36.214,23.488 36.854,23.488 K1.A2
CLK/TM1637: Q2.3 R6.2 U2.18 | length 12.1
  Top Layer w0.3: Q2.3 25.327,40.896 25.932,40.291 R6.2 33.422,40.291 34.718,41.587 35.733,41.587 U2.18
D+: J1.A6 J1.B6 U4.1 | length 13
  Top Layer w0.3: U4.1 18.014,8.735 18.014,7.45 18.073,7.391 18.073,7.008 18.704,6.377 J1.A6 18.704,2.977 18.454,2.727 v2(18.454,2.591) ; v2(19.692,0.737) 19.704,0.75 J1.B6
  Bottom Layer w0.3: v2(18.454,2.591) 18.514,2.531 18.514,2.05 19.692,0.873 v2(19.692,0.737)
D-: J1.A7 J1.B7 U4.3 | length 12.5
  Top Layer w0.3: J1.B7 18.204,3.563 17.656,3.015 17.656,1.603 17.831,1.428 19.028,1.428 19.204,1.603 J1.A7@19.204,4.286 ; J1.A7@19.204,4.286 J1.A7 19.204,6.361 19.898,7.054 19.898,8.738 U4.3
DIO/TM1637: Q1.3 R3.2 U2.17 | length 22.9
  Top Layer w0.3: Q1.3@25.365,47.622 25.365,48.438 25.995,49.068 R3.2@27.468,49.068 ; R3.2 27.534,49.052 v2(30.248,49.052) ; U2.17 35.805,42.917 39.591,42.917 v2(39.596,42.911)
  Top Layer w0.6: Q1.3 Q1.3@25.365,47.622
  Bottom Layer w0.3: v2(30.248,49.052) 30.248,47.037 34.423,42.862 39.547,42.862 v2(39.596,42.911)
GND: C1.2 C2.2 C3.2 C4.2 C5.2 C6.2 C7.2 C8.2 C9.2 C10.1 C11.2 C12.2 D1.1 D5.1 J1.A1/B12 J1.B1/A12 J1.SH1 J1.SH2 J1.SH3 J1.SH4 J2.1 P1.3 Q4.2 R7.1 R8.1 R21.1 SW1.A SW2.A SW3.A U1.2 U3.1 U4.2 U5.7
  other v1: 8.23,-1.443 11.23,-1.443 14.23,-1.443 17.23,-1.443 20.23,-1.443 23.23,-1.443 32.23,-1.443 35.23,-1.443 38.23,-1.443 41.23,-1.443 44.23,-1.443 47.23,-1.443 50.23,-1.443 15.73,1.557 27.73,1.557 33.73,1.557 45.73,1.557 2.23,4.557 11.23,4.557 29.23,4.557 32.23,4.557 35.23,4.557 41.23,4.557 50.23,4.557 53.23,4.557 24.73,7.557 27.73,7.557 30.73,7.557 33.73,7.557 45.73,7.557 51.73,7.557 54.73,7.557 2.23,10.557 5.23,10.557 11.23,10.557 26.23,10.557 29.23,10.557 32.23,10.557 41.23,10.557 53.23,10.557 3.73,13.557 6.73,13.557 9.73,13.557 27.73,13.557 30.73,13.557 33.73,13.557 36.73,13.557 39.73,13.557 45.73,13.557 48.73,13.557 2.23,16.557 8.23,16.557 14.23,16.557 32.23,16.557 35.23,16.557 38.23,16.557 41.23,16.557 47.23,16.557 50.23,16.557 3.73,19.557 9.73,19.557 30.73,19.557 33.73,19.557 36.73,19.557 39.73,19.557 45.73,19.557 48.73,19.557 2.23,22.557 8.23,22.557 14.23,22.557 32.23,22.557 35.23,22.557 41.23,22.557 47.23,22.557 3.73,25.557 12.73,25.557 15.73,25.557 21.73,25.557 24.73,25.557 30.73,25.557 33.73,25.557 39.73,25.557 45.73,25.557 51.73,25.557 2.23,28.557 11.23,28.557 14.23,28.557 17.23,28.557 20.23,28.557 23.23,28.557 26.23,28.557 32.23,28.557 38.23,28.557 50.23,28.557 53.23,28.557 3.73,31.557 12.73,31.557 15.73,31.557 18.73,31.557 21.73,31.557 24.73,31.557 27.73,31.557 30.73,31.557 33.73,31.557 36.73,31.557 39.73,31.557 48.73,31.557 51.73,31.557 54.73,31.557 2.23,34.557 5.23,34.557 8.23,34.557 11.23,34.557 14.23,34.557 20.23,34.557 38.23,34.557 47.23,34.557 50.23,34.557 53.23,34.557 6.73,37.557 27.73,37.557 30.73,37.557 36.73,37.557 39.73,37.557 48.73,37.557 51.73,37.557 54.73,37.557 2.23,40.557 5.23,40.557 14.23,40.557 17.23,40.557 38.23,40.557 41.23,40.557 53.23,40.557 3.73,43.557 6.73,43.557 24.73,43.557 42.73,43.557 48.73,43.557 54.73,43.557 2.23,46.557 29.23,46.557 41.23,46.557 53.23,46.557 15.73,49.557 24.73,49.557 33.73,49.557 42.73,49.557 54.73,49.557 2.23,52.557 17.23,52.557 20.23,52.557 23.23,52.557 26.23,52.557 29.23,52.557 32.23,52.557 35.23,52.557 47.23,52.557 53.23,52.557 21.73,55.557 27.73,55.557 45.73,55.557 48.73,55.557 54.73,55.557 2.23,58.557 11.23,58.557 20.23,58.557 26.23,58.557 32.23,58.557 35.23,58.557 47.23,58.557 53.23,58.557 15.73,61.557 24.73,61.557 27.73,61.557 36.73,61.557 45.73,61.557 48.73,61.557 54.73,61.557 2.23,64.557 5.23,64.557 8.23,64.557 17.23,64.557 20.23,64.557 23.23,64.557 26.23,64.557 44.23,64.557 47.23,64.557 53.23,64.557 3.73,67.557 9.73,67.557 12.73,67.557 15.73,67.557 18.73,67.557 21.73,67.557 24.73,67.557 30.73,67.557 33.73,67.557 36.73,67.557 39.73,67.557 42.73,67.557 45.73,67.557 54.73,67.557 2.23,70.557 5.23,70.557 8.23,70.557 20.23,70.557 38.23,70.557 41.23,70.557 50.23,70.557 53.23,70.557 3.73,73.557 6.73,73.557 9.73,73.557 18.73,73.557 21.73,73.557 27.73,73.557 30.73,73.557 33.73,73.557 48.73,73.557 51.73,73.557 54.73,73.557 2.23,76.557 5.23,76.557 11.23,76.557 14.23,76.557 17.23,76.557 20.23,76.557 23.23,76.557 32.23,76.557 35.23,76.557 38.23,76.557 44.23,76.557 47.23,76.557 50.23,76.557 53.23,76.557 3.73,79.557 6.73,79.557 9.73,79.557 18.73,79.557 21.73,79.557 24.73,79.557 27.73,79.557 30.73,79.557 42.73,79.557 45.73,79.557 48.73,79.557 51.73,79.557 54.73,79.557 8.23,82.557 11.23,82.557 14.23,82.557 17.23,82.557 20.23,82.557 23.23,82.557 26.23,82.557 29.23,82.557 32.23,82.557 35.23,82.557 38.23,82.557 41.23,82.557 44.23,82.557 47.23,82.557 50.23,82.557
NetC3_1: C3.1 C4.1 D6.1 U1.1 U1.3 | length 17.4
  Top Layer w0.6: D6.1 5.731,22.073 5.731,25.427 C3.1 5.698,25.488 5.698,28.473 C4.1 5.518,28.679 5.518,32.989 5.87,33.34 6.462,33.34 ; U1.3 8.216,31.451 6.821,31.451 6.462,31.81 6.462,33.34 ; U1.1 8.211,33.34 6.462,33.34
NetC7_1: C7.1 U3.4 | length 5
  Top Layer w0.3: U3.4 19.012,15.181 20.312,13.881 21.499,13.881 22.099,13.281 C7.1
NetC10_2: C10.2 J2.2 R14.2 U5.14 | length 36.3
  Top Layer w0.3: U5.14 11.397,50.506 12.959,52.068 v2@13.831,52.068 ; R14.2 12.603,75.739 v2(12.603,73.595)
  Top Layer w0.5: J2.2 R14.2@12.553,75.848 ; R14.2@12.586,75.881 12.586,78.847 C10.2
  Bottom Layer w0.3: v2(12.603,73.595) 14.263,71.934 14.263,52.478 13.846,52.061 v2(13.846,52.053)
NetC11_1: C11.1 U5.8 | length 4.8
  Top Layer w0.3: U5.8 12.047,44.462 12.312,44.726 C11.1
NetD1_2: D1.2 R1.2 | length 5.3
  Top Layer w0.3: R1.2 5.819,3.359 D1.2
NetD2_1: D2.1 D3.1 K1.A1 Q4.3 | length 17.1
  Top Layer w0.6: D3.1 44.315,29.065 44.592,28.788 Q4.3@44.615,28.788 ; Q4.3@44.615,28.716 46.339,28.716 46.984,28.716 49.118,26.582 K1.A1 49.376,22.967 D2.1
NetD2_2: D2.2 R18.2 | length 3.9
  Top Layer w0.3: D2.2@52.87,19.823 52.87,16.032 R18.2
NetD4_2: D4.2 P1.4 R22.1 | length 10.1
  Top Layer w0.3: P1.4@6.929,63.966 7.866,63.029 D4.2@13.527,63.029 ; D4.2 13.584,63.086 R22.1
NetD5_2: D5.2 R22.2 | length 16.2
  Top Layer w0.3: D5.2 9.104,61.068 10.479,61.068 10.961,61.55 v2(11.096,61.55) ; v2(11.759,67.918) 12.417,68.576 16.209,68.576 16.651,68.134 R22.2@16.651,66.133
  Bottom Layer w0.3: v2(11.096,61.55) 11.096,67.256 v2(11.759,67.918)
NetDP1_D1: DP1.D1 U2.15 | length 55.4
  Top Layer w0.3: DP1.D1@26.637,81.08 26.637,76.531 23.32,73.215 23.32,70.396 30.455,63.261 30.455,61.027 v2(30.42,60.991) ; v2(30.441,56.595) 30.441,54.461 v2(31.378,53.524) ; U2.15 35.811,45.451 40.491,45.451 v2(40.503,45.439)
  Bottom Layer w0.3: v2(30.42,60.991) 30.43,60.981 30.43,56.606 v2(30.441,56.595) ; v2(31.378,53.524) 32.202,54.348 40.384,54.348 40.56,54.172 40.56,45.495 v2(40.503,45.439)
NetDP1_D2: DP1.D2 U2.14 | length 57.5
  Top Layer w0.3: DP1.D2@34.261,81.071 34.261,78.255 34.086,78.079 29.581,78.079 24.02,72.518 24.02,70.661 29.567,65.115 39.457,65.115 v2(39.549,65.206) ; U2.14 35.829,46.763 39.611,46.763 v2(39.642,46.794) ; v2(39.596,53.274) 39.604,53.282 39.604,56.693 v2(39.612,56.701)
  Bottom Layer w0.3: v2(39.549,65.206) 39.58,65.175 39.58,56.732 v2(39.612,56.701) ; v2(39.596,53.274) 39.619,53.251 39.619,46.816 v2(39.642,46.794)
NetDP1_D3: DP1.D3 U2.13 | length 55.7
  Top Layer w0.3: U2.13 35.831,47.971 38.78,47.971 v2(38.812,47.939) ; DP1.D3 36.858,81.032 36.858,77.583 36.682,77.407 30.188,77.407 24.722,71.941 24.722,70.896 29.819,65.799 37.876,65.799 v2(37.893,65.816) ; v2(37.824,58.231) 37.824,52.863 v2(38.704,51.982)
  Bottom Layer w0.3: v2(37.824,58.231) 37.858,58.265 37.858,65.782 v2(37.893,65.816) ; v2(38.704,51.982) 38.758,51.929 38.758,48.023 v2@38.827,47.954
NetDP1_D4: DP1.D4 U2.12 | length 28.8
  Top Layer w0.3: U2.12 35.839,49.233 40.235,49.233 40.411,49.409 40.411,57.638 41.301,58.527 v2(42.303,58.527)
  Bottom Layer w0.3: DP1.D4 39.35,69.166 42.303,66.213 v2(42.303,58.527)
NetDP1_DP: DP1.DP U2.9 | length 43.1
  Top Layer w0.3: DP1.DP 31.794,70.856 31.794,69.18 31.97,69.004 46.12,69.004 50.742,64.383 50.742,49.439 50.566,49.263 U2.9@45.328,49.263
NetDP1_SEGA: DP1.SEGA U2.2 | length 61.9
  Top Layer w0.3: U2.2@45.339,40.384 45.355,40.367 52.016,40.367 v2(52.031,40.352)
  Bottom Layer w0.3: DP1.SEGA 29.224,81.046 29.224,78.042 29.4,77.866 38.027,77.866 52.031,63.863 v2(52.031,40.352)
NetDP1_SEGB: DP1.SEGB U2.3 | length 49.4
  Top Layer w0.3: DP1.SEGB 39.407,81.023 39.407,75.108 v2(39.464,75.051) ; U2.3 45.325,41.659 50.613,41.659 v2(50.619,41.665)
  Bottom Layer w0.3: v2(39.464,75.051) 50.619,63.896 v2(50.619,41.665)
NetDP1_SEGC: DP1.SEGC U2.4 | length 52.4
  Top Layer w0.3: DP1.SEGC 36.82,73.47 45.123,73.47 52.376,66.217 52.376,43.098 52.2,42.923 U2.4
NetDP1_SEGD: DP1.SEGD U2.5 | length 47.2
  Top Layer w0.3: U2.5 45.346,44.22 49.638,44.22 v2(49.666,44.248)
  Bottom Layer w0.3: DP1.SEGD 29.223,70.887 29.223,55.68 29.512,55.39 42.591,55.39 49.666,48.316 v2(49.666,44.248)
NetDP1_SEGE: DP1.SEGE U2.6 | length 45.1
  Top Layer w0.3: U2.6 45.361,45.505 48.577,45.505 v2(48.619,45.547)
  Bottom Layer w0.3: DP1.SEGE 26.678,70.892 26.678,69.186 28.589,67.274 28.589,55.698 29.332,54.956 41.82,54.956 48.619,48.156 v2(48.619,45.547)
NetDP1_SEGF: DP1.SEGF U2.7 | length 52.4
  Top Layer w0.3: U2.7 45.341,46.755 51.41,46.755 51.586,46.931 51.586,65.766 v2(50.959,66.393)
  Bottom Layer w0.3: DP1.SEGF@31.736,81.074 31.736,79.264 32.035,78.965 38.206,78.965 50.567,66.604 50.613,66.604 50.824,66.393 v2(50.959,66.393)
NetDP1_SEGG: DP1.SEGG U2.8 | length 28.6
  Top Layer w0.3: DP1.SEGG@37.054,71.075 DP1.SEGG@37.099,71.12 ; v2(41.248,56.951) 41.248,48.456 41.702,48.003 U2.8
  Bottom Layer w0.3: DP1.SEGG 36.81,69.015 41.248,64.576 v2(41.248,56.951)
NetF1_1: F1.1 J1.A4/B9 J1.B4/A9 | length 27.8
  Top Layer w0.6: v2(2.417,7.887) 5.804,7.887 F1.1 ; v2(16.459,7.426) 16.459,7.372 16.554,7.277 J1.A4/B9 ; J1.B4/A9 v2(21.355,7.385) v2(21.355,7.385)
  Bottom Layer w0.6: v2(2.417,7.887) 11.847,7.887 12.289,7.446 16.439,7.446 16.479,7.406 21.335,7.406 v2(21.355,7.385)
NetJ1_A5: J1.A5 R7.2 | length 18
  Top Layer w0.3: v2(17.389,6.434) 17.389,6.298 17.704,5.983 J1.A5 ; R7.2@29.752,2.277 29.862,2.387 v2(29.862,5.753)
  Bottom Layer w0.3: v2(17.389,6.434) 29.181,6.434 v2(29.862,5.753)
NetJ1_B5: J1.B5 R8.2 | length 14.9
  Top Layer w0.3: J1.B5 20.704,2.431 21,2.135 v2(21,2) ; R8.2 26.173,2.348 v2(26.173,5.575)
  Bottom Layer w0.3: v2(21,2) 25.946,2 26.173,2.227 v2(26.173,5.575)
NetJ3_1: J3.1 K1.NO | length 8.9
  Top Layer w1.5: K1.NO@37.21,11.022 37.21,10.802 38.092,9.921 J3.1
NetJ3_2: J3.2 K1.COM | length 22.7
  Top Layer w1.5: J3.2@43.118,2.555 K1.COM
NetJ3_3: J3.3 K1.NC | length 8.9
  Top Layer w1.5: J3.3 48.092,9.905 49.118,10.932 K1.NC
NetQ1_2: Q1.2 R2.2 U5.16 | length 15.2
  Top Layer w0.3: U5.16@10.093,49.091 10.093,47.621 11.344,46.37 v2(12.502,46.37) ; v2(17.84,46.26) 17.975,46.26 18.193,46.043 R2.2 20.814,46.208 21.873,46.208 22.263,46.598 22.891,46.598 Q1.2
  Bottom Layer w0.3: v2(12.502,46.37) 12.557,46.315 17.785,46.315 v2(17.84,46.26)
NetQ2_2: Q2.2 R5.2 U5.17 | length 19.3
  Top Layer w0.3: U5.17 9.447,46.43 v2(10.596,45.281) ; v2(17.716,42.456) 17.716,41.686 19.15,40.252 R5.2 21.2,40.787 Q2.2
  Bottom Layer w0.3: v2(10.596,45.281) 10.685,45.192 13.536,45.192 16.272,42.456 v2(17.716,42.456)
NetQ3_2: Q3.2 R15.1 U5.2 | length 33.7
  Top Layer w0.3: v2(5.823,44.593) 5.869,44.547 7.972,44.547 8.147,44.371 U5.2 ; v2(17.298,36.114) 17.338,36.154 22.33,36.154 23.51,34.975 R15.1 23.187,32.379 Q3.2
  Bottom Layer w0.3: v2(5.823,44.593) 5.87,44.546 7.956,44.546 8.131,44.37 8.131,38.189 10.206,36.114 v2(17.298,36.114)
NetQ4_1: Q4.1 R17.1 R21.2 | length 5.6
  Top Layer w0.3: R21.2 45.163,33.524 R17.1 45.192,31.538 Q4.1
NetQ5_2: Q5.2 R19.1 U5.3 | length 41.2
  Top Layer w0.3: v2(5.83,45.528) 5.865,45.492 8.254,45.492 8.797,44.948 U5.3 ; v2(17.342,37.059) 27.025,37.059 28.679,35.406 28.679,33.266 R19.1 28.92,32.379 Q5.2
  Bottom Layer w0.3: v2(5.83,45.528) 5.87,45.488 8.258,45.488 8.801,44.945 8.801,38.572 10.373,37 17.283,37 v2(17.342,37.059)
NetR4_1: R4.1 U4.6 | length 12.6
  Top Layer w0.3: v2(10.325,16.425) 12.583,16.425 R4.1 ; v2(16.546,10.835) 16.566,10.854 17.859,10.854 18.004,10.999 U4.6
  Bottom Layer w0.3: v2(10.325,16.425) 15.82,10.93 16.45,10.93 v2(16.546,10.835)
NetR4_2: R4.2 U3.5 | length 11
  Top Layer w0.3: R4.2 12.704,19.595 20.077,19.595 20.253,19.419 20.253,16.173 U3.5
NetR9_1: R9.1 U4.4 | length 14.7
  Top Layer w0.3: U4.4 19.924,11.275 20.804,11.275 v2(21.63,10.449) ; R9.1 26.606,16.4 v2(29.175,16.4)
  Bottom Layer w0.3: v2(21.63,10.449) 23.224,10.449 v2(29.175,16.4)
NetR9_2: R9.2 U3.6 | length 7.1
  Top Layer w0.3: U3.6 21.55,16.146 21.55,17.375 23.689,19.514 R9.2
NetR17_2: R17.2 U5.13 | length 38.9
  Top Layer w0.3: U5.13 12.069,49.06 12.069,50.455 12.575,50.96 13.816,50.96 v2@13.824,50.968 ; v2(33.224,38.012) 37.713,33.523 42.114,33.523 R17.2
  Bottom Layer w0.3: v2(13.832,50.96) 13.924,50.868 20.369,50.868 v2(33.224,38.012)
PC5/SET: R11.1 SW2.B U5.15 | length 36.2
  Top Layer w0.4: R11.1 9.332,54.604 13.186,54.604 v2(15.013,56.43) ; U5.15@10.742,49.044 10.742,50.732 12.838,52.829 13.93,52.829 15,53.899 v2(15,54) ; v2(20.395,53.922) 23.824,53.922 27.407,57.505 SW2.B
  Bottom Layer w0.4: v2(15.013,56.43) 15.007,56.424 15.007,54.051 14.978,54.022 15.039,53.961 20.356,53.961 v2(20.395,53.922)
PD2/UP: R10.1 SW1.B U5.19 | length 19.1
  Top Layer w0.4: U5.19@8.172,49.064 U5.19 8.147,49.935 8.966,50.754 8.966,51.765 R10.1@9.27,52.069 ; R10.1@9.294,51.579 9.492,51.777 10.899,51.777 12.518,53.396 13.272,53.396 17.285,57.41 SW1.B@22.115,57.41 ; SW1.B@22.537,57.306 SW1.B@22.641,57.41 ; SW1.B@22.737,57.41 SW1.B@22.641,57.41 ; SW1.B SW1.B@22.641,57.41
PD3/DOWN: R12.1 SW3.B U5.20 | length 50.6
  Top Layer w0.4: v2(5.75,48.968) 7.472,48.968 7.497,48.993 U5.20 ; R12.1@9.278,58.147 9.777,57.648 v2(11.514,57.648) 16.111,57.648 17.963,59.5 43.981,59.5 44.216,59.265 SW3.B
  Bottom Layer w0.4: v2(5.75,48.968) 9.434,52.652 9.434,55.084 11.449,57.099 11.449,57.583 v2(11.514,57.648)
RST: C12.1 P1.1 R13.1 U5.4 | length 45.4
  Top Layer w0.3: v2(5.805,46.468) 8.111,46.468 9.46,45.12 9.46,43.251 U5.4 9.447,41.314 10.096,40.665 C12.1 ; P1.1 7.013,71.553 9.906,71.553 10.864,70.594 ; v2(11.852,64.844) 11.821,64.844 10.864,65.801 10.864,70.588 12.487,70.588 R13.1
  Bottom Layer w0.3: v2(5.805,46.468) 10.224,46.468 12.57,48.814 12.57,64.067 11.852,64.786 v2(11.852,64.844)
SWIM: P1.2 U5.18 | length 29
  Top Layer w0.3: v2(5.776,47.402) 8.42,47.402 8.795,47.777 U5.18
  Bottom Layer w0.3: v2(5.776,47.402) 4.129,47.402 3.953,47.578 3.953,65.953 P1.2@7.016,69.016
UART_RX_TO_TX_CH340C: Q3.3 R16.1 U3.3 | length 14.4
  Top Layer w0.3: U3.3 17.804,16.206 17.804,17.418 v2@19.223,18.836 ; v2(23.503,23.347) 23.503,25.472 R16.1 23.505,27.261 Q3.3
  Bottom Layer w0.3: v2(19.238,18.852) 19.238,18.967 23.503,23.232 v2(23.503,23.347)
UART_TX_TO_RX_CH340C: Q5.3 R20.1 U3.2 | length 26.8
  Top Layer w0.3: U3.2 16.472,17.983 v2(16.481,17.992) ; v2@26.193,21.996 31.451,21.996 31.627,22.172 31.627,24.583 32.293,25.249 32.293,26.892 31.291,27.894 Q5.3
  Bottom Layer w0.3: v2(16.481,17.992) 16.617,17.992 16.862,17.747 19.847,17.747 24.144,22.044 26.145,22.044 v2(26.186,22.004)
pads on no net: J1. J1.A8 J1.B8 U1.4 U2.1 U2.10 U2.11 U2.19 U2.20 U3.7 U3.8 U3.9 U3.10 U3.11 U3.12 U3.13 U3.14 U3.15 U5.1 U5.5 U5.6 U5.10 U5.11 U5.12

## Polygon pours and split planes (outlines as drawn)
GND on Top Layer "GND_L01_P020" (solid, remove dead copper, pour order 20): 1,0 ccw(c4,0) 4,-3 54,-3 ccw(c54,0) 57,0 57,84 ccw(c54,84) 54,87 4,87 ccw(c4,84) 1,84
GND on Bottom Layer "GND_L02_P021" (solid, remove dead copper, pour order 21): 1,0 ccw(c4,0) 4,-3 54,-3 ccw(c54,0) 57,0 57,84 ccw(c54,84) 54,87 4,87 ccw(c4,84) 1,84

## Keep-outs
Keep-Out Layer:
  circle w0.75: c54,0 r2.5
  circle w0.75: c54,84 r2.5
  circle w0.75: c4,84 r2.5
  circle w0.75: c4,0 r2.5
  lines w0.15: 35.72,10.354 35.72,11.54 36.633,12.453 37.58,12.453 39.337,10.696 39.337,1.47 39.149,1.283 36.934,1.283 36.841,1.375 36.841,9.233 35.72,10.354 ; 41.813,2.034 41.813,25.748 42.48,26.415 43.788,26.415 44.419,25.785 44.419,2.073 43.575,1.229 42.618,1.229 41.813,2.034 ; 46.791,2.05 46.791,10.845 48.346,12.4 49.648,12.4 50.482,11.567 50.482,10.032 49.33,8.88 49.33,2.014 48.556,1.24 47.6,1.24 46.791,2.05
  lines w0.254: 1,0 1,84 ; 4,-3 54,-3 ; 4,87 54,87 ; 57,0 57,84

## Silkscreen, mask and mechanical layers (free items; w line width, h text height)
Top Overlay:
  text "Thermostat by Tkach rev.v.1.0" at 15.36,84.901 h1
  text "SET" at 31.933,65.15 h1
  text "DOWN" at 42.34,65.084 h1
  text "UP" at 21.978,65.051 h1
  text "STLINK_PWR" at 4.682,59.282 h1
  text "RELAY_PWR" at 51.228,17.562 h1
  text "USB_PWR" at 8.213,-1.484 h1
  text "NO" at 37.425,-2.058 h0.85
  text "COM" at 42.022,-2.058 h0.85
  text "NC" at 47.469,-2.058 h0.85
Mechanical 1:
  the board outline again, w0.254

## Text inside footprints (layer, text, board x,y; h text height)
DP1: Top Overlay "8.8.8.8." at 20.808,74.095 h3.81
P1: Top Overlay "SWIM" at 1.647,68.538 h1.52; Top Overlay "+3.3V" at 1.537,63.525 h1.52; Top Overlay "GND" at 1.997,66.046 h1.52; Top Overlay "RST" at 2.522,70.609 h1.52